# EAGLE board ProtoSnap-LilyTwinkle-Panel-v10 (EAGLE 6.3)
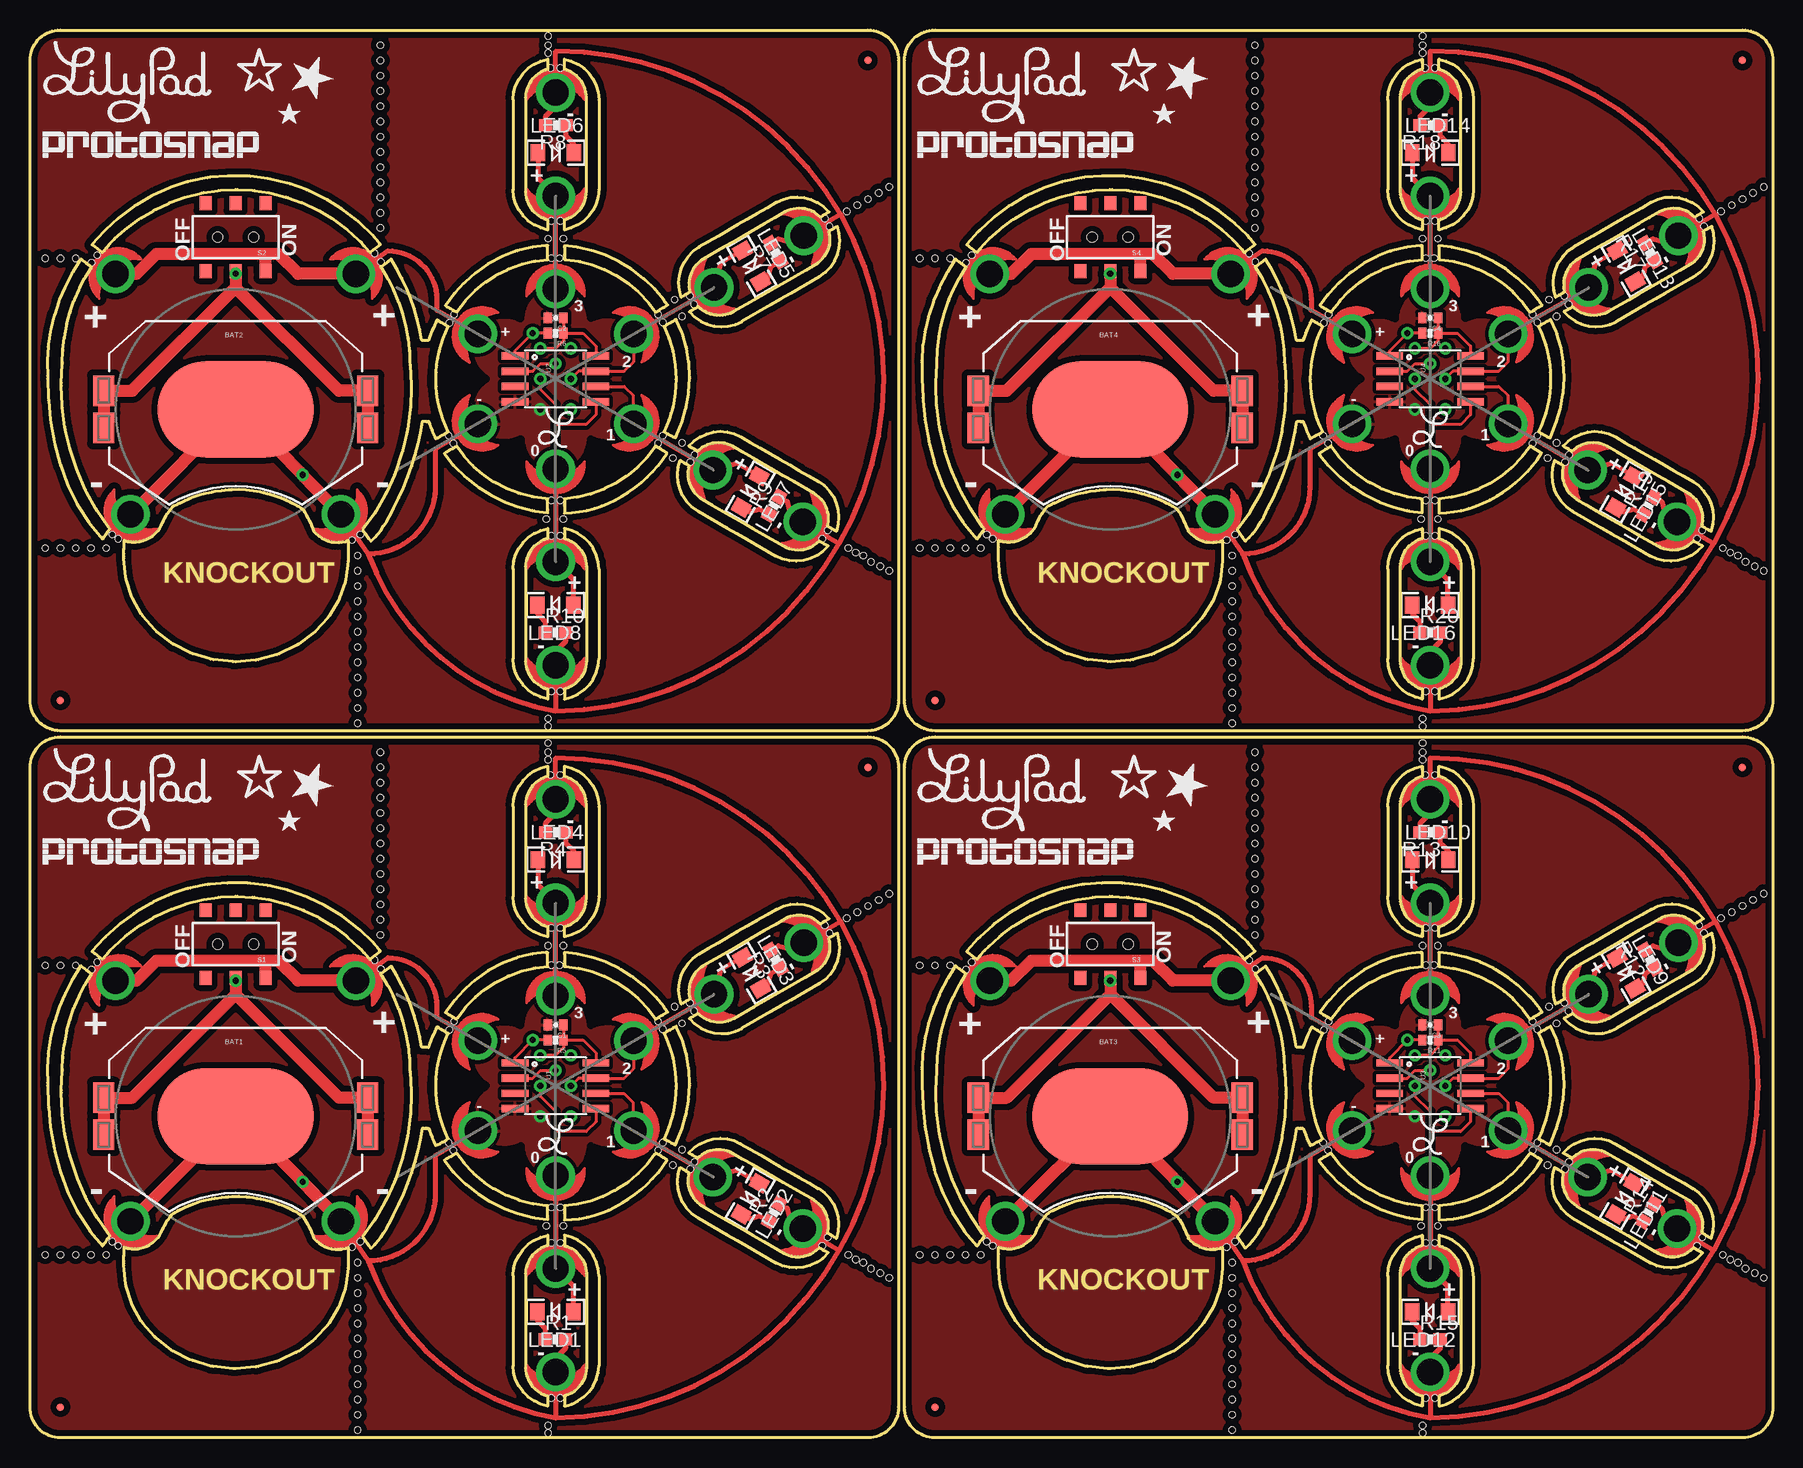
[diagram p0: board, top side]
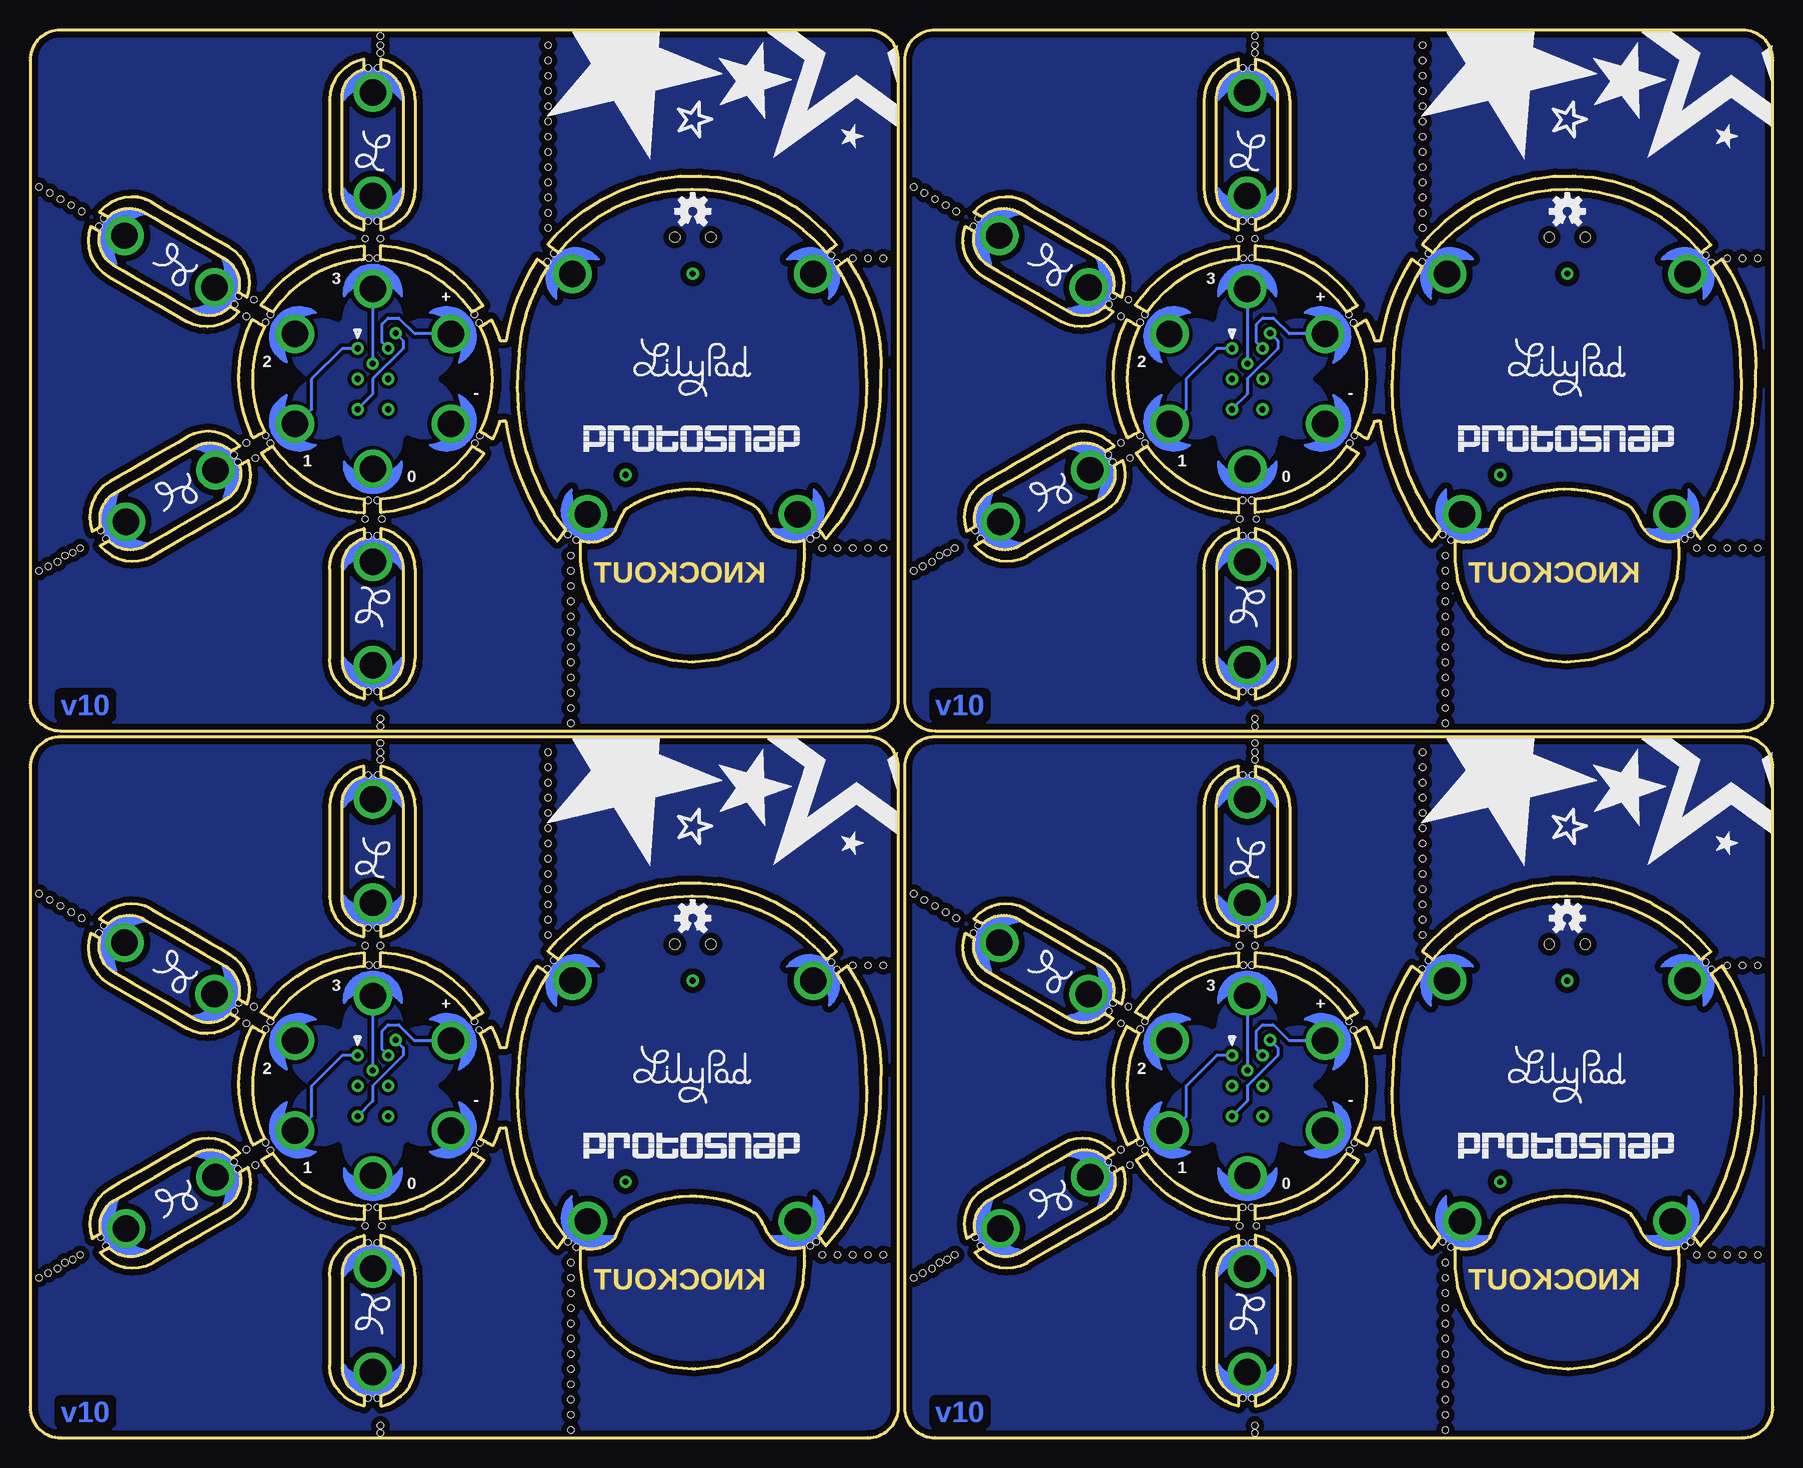
[diagram p1: board, bottom side, seen from below]

Size 145.29 x 117.35 mm. Coordinates in mm from the lower left corner, seen from the top.
Outline: 4528 segments
Copper layers (1*16): Top 0.035mm / dielectric 1.5mm / Bottom 0.035mm
Design rules "default": minimum track width 8mil, minimum drill 20mil, track to track 8mil, track to pad 8mil, pad to pad 8mil, via to via 8mil, smd to smd 8mil, copper to edge 8mil, drill to drill 8mil, minimum pad ring 12mil, minimum via ring 10mil, stop-mask expansion 4mil, vias tented up to drill 20mil, thermal gap 10mil
Holes 0.51 mm at 6.85,16.35 7.35,16 5.6,39.65 5.12,39.02 28.73,39.8 29.25,39.08 26.85,15.9 27.55,16.35 43.4,55.25 44.2,55.25 43.45,42.5 44.2,42.5 43.45,39.4 44.15,39.4 35.35,34.7 34.95,34 34.9,24.6 35.3,23.95 43.45,19.2 44.2,19.2 52.35,23.95 52.75,24.6 55.4,23 55.05,22.4 66.5,16.7 66.05,16 43.45,16.25 44.2,16.25 43.45,3.3 44.2,3.3 52.35,34.7 52.75,34.05 55,36.25 55.35,35.55 66.25,42.7 66.65,42.05 6.35,15.24 5.08,15.24 3.81,15.24 2.54,15.24 1.27,15.24 3.81,39.37 2.54,39.37 1.27,39.37 27.3,14.61 27.3,13.34 27.3,12.06 27.3,10.79 27.3,9.53 27.3,8.26 27.3,6.99 27.3,5.71 27.3,4.45 27.3,3.17 27.3,1.91 27.3,0.64 29.21,41.91 29.21,43.18 29.21,44.45 29.21,45.72 29.21,46.99 29.21,48.26 29.21,49.53 29.21,50.8 29.21,52.07 29.21,53.34 29.21,54.61 29.21,55.88 29.21,57.15 43.18,57.91 43.18,57.15 43.18,56.52 43.18,0.38 43.18,1.02 44.45,17.65 43.05,17.65 53.59,22.73 54.36,24 54.36,34.54 53.72,35.94 43.18,41.02 44.45,41.02 68.07,43.31 68.96,43.81 69.85,44.32 70.74,44.83 71.63,45.34 68.2,15.24 68.83,14.86 69.47,14.61 70.1,14.1 70.87,13.72 71.63,13.34 6.85,75.28 7.35,74.93 5.6,98.58 5.12,97.95 28.73,98.73 29.25,98 26.85,74.83 27.55,75.28 43.4,114.18 44.2,114.18 43.45,101.43 44.2,101.43 43.45,98.33 44.15,98.33 35.35,93.63 34.95,92.93 34.9,83.53 35.3,82.88 43.45,78.13 44.2,78.13 52.35,82.88 52.75,83.53 55.4,81.93 55.05,81.33 66.5,75.63 66.05,74.93 43.45,75.18 44.2,75.18 43.45,62.23 44.2,62.23 52.35,93.63 52.75,92.98 55,95.18 55.35,94.48 66.25,101.63 66.65,100.98 6.35,74.17 5.08,74.17 3.81,74.17 2.54,74.17 1.27,74.17 3.81,98.3 2.54,98.3 1.27,98.3 27.3,73.53 27.3,72.26 27.3,70.99 27.3,69.72 27.3,68.45 27.3,67.18 27.3,65.91 27.3,64.64 27.3,63.37 27.3,62.1 27.3,60.83 27.3,59.56 29.21,100.84 29.21,102.11 29.21,103.38 29.21,104.65 29.21,105.92 29.21,107.19 29.21,108.46 29.21,109.73 29.21,111 29.21,112.27 29.21,113.54 29.21,114.81 29.21,116.08 43.18,116.84 43.18,116.08 43.18,115.44 43.18,59.31 43.18,59.94 44.45,76.58 43.05,76.58 53.59,81.66 54.36,82.93 54.36,93.47 53.72,94.87 43.18,99.95 44.45,99.95 68.07,102.23 68.96,102.74 69.85,103.25 70.74,103.76 71.63,104.27 68.2,74.17 68.83,73.79 69.47,73.53 70.1,73.03 70.87,72.64 71.63,72.26 79.75,16.35 80.25,16 78.5,39.65 78.02,39.02 101.62,39.8 102.15,39.08 99.75,15.9 100.45,16.35 116.3,55.25 117.1,55.25 116.35,42.5 117.1,42.5 116.35,39.4 117.05,39.4 108.25,34.7 107.85,34 107.8,24.6 108.2,23.95 116.35,19.2 117.1,19.2 125.25,23.95 125.65,24.6 128.3,23 127.95,22.4 139.4,16.7 138.95,16 116.35,16.25 117.1,16.25 116.35,3.3 117.1,3.3 125.25,34.7 125.65,34.05 127.9,36.25 128.25,35.55 139.15,42.7 139.55,42.05 79.25,15.24 77.98,15.24 76.71,15.24 75.44,15.24 74.17,15.24 76.71,39.37 75.44,39.37 74.17,39.37 100.2,14.61 100.2,13.34 100.2,12.06 100.2,10.79 100.2,9.53 100.2,8.26 100.2,6.99 100.2,5.71 100.2,4.45 100.2,3.17 100.2,1.91 100.2,0.64 102.11,41.91 102.11,43.18 102.11,44.45 102.11,45.72 102.11,46.99 102.11,48.26 102.11,49.53 102.11,50.8 102.11,52.07 102.11,53.34 102.11,54.61 102.11,55.88 102.11,57.15 116.08,57.91 116.08,57.15 116.08,56.52 116.08,0.38 116.08,1.02 117.35,17.65 115.95,17.65 126.49,22.73 127.25,24 127.25,34.54 126.62,35.94 116.08,41.02 117.35,41.02 140.97,43.31 141.86,43.81 142.75,44.32 143.64,44.83 144.53,45.34 141.1,15.24 141.73,14.86 142.37,14.61 143,14.1 143.76,13.72 144.53,13.34 79.75,75.28 80.25,74.93 78.5,98.58 78.02,97.95 101.62,98.73 102.15,98 99.75,74.83 100.45,75.28 116.3,114.18 117.1,114.18 116.35,101.43 117.1,101.43 116.35,98.33 117.05,98.33 108.25,93.63 107.85,92.93 107.8,83.53 108.2,82.88 116.35,78.13 117.1,78.13 125.25,82.88 125.65,83.53 128.3,81.93 127.95,81.33 139.4,75.63 138.95,74.93 116.35,75.18 117.1,75.18 116.35,62.23 117.1,62.23 125.25,93.63 125.65,92.98 127.9,95.18 128.25,94.48 139.15,101.63 139.55,100.98 79.25,74.17 77.98,74.17 76.71,74.17 75.44,74.17 74.17,74.17 76.71,98.3 75.44,98.3 74.17,98.3 100.2,73.53 100.2,72.26 100.2,70.99 100.2,69.72 100.2,68.45 100.2,67.18 100.2,65.91 100.2,64.64 100.2,63.37 100.2,62.1 100.2,60.83 100.2,59.56 102.11,100.84 102.11,102.11 102.11,103.38 102.11,104.65 102.11,105.92 102.11,107.19 102.11,108.46 102.11,109.73 102.11,111 102.11,112.27 102.11,113.54 102.11,114.81 102.11,116.08 116.08,116.84 116.08,116.08 116.08,115.44 116.08,59.31 116.08,59.94 117.35,76.58 115.95,76.58 126.49,81.66 127.25,82.93 127.25,93.47 126.62,94.87 116.08,99.95 117.35,99.95 140.97,102.23 141.86,102.74 142.75,103.25 143.64,103.76 144.53,104.27 141.1,74.17 141.73,73.79 142.37,73.53 143,73.03 143.76,72.64 144.53,72.26
tRestrict: area 33.6,29.3 to 54,39.6; area 33.6,19.1 to 54,29.4; area 33.6,88.3 to 54,98.5; area 33.6,78.1 to 54,88.3; area 106.5,29.3 to 126.9,39.6; area 106.5,19.1 to 126.9,29.4; area 106.5,88.3 to 126.9,98.5; area 106.5,78.1 to 126.9,88.3
bRestrict: area 33.6,29.3 to 54,39.6; area 33.6,19.1 to 54,29.4; area 33.6,88.3 to 54,98.5; area 33.6,78.1 to 54,88.3; area 106.5,29.3 to 126.9,39.6; area 106.5,19.1 to 126.9,29.4; area 106.5,88.3 to 126.9,98.5; area 106.5,78.1 to 126.9,88.3

## Footprints (pad centres in the part's own frame; a part is rotated, then mirrored left to right if it is on the bottom)
PETAL-SMALL-2SIDE = drill 2.2: 1 0,0
PETAL-SMALL = drill 2.2: 1 0,0
BATTCON_20MM_4LEGS = smd 1.778 x 2.54: 1 -11,1.55; 3 11,1.55; P$1 -11,-1.55; P$2 11,-1.55 | smd 13 x 8: 2 0,0
0402-CAP = smd 0.7 x 0.9: 1 -0.65,0; 2 0.65,0
MICRO-FIDUCIAL = smd 0.635 x 0.635: 1 0,0
LED-1206 = smd 1.2 x 1.4: A -1.5,0; C 1.5,0
0603-RES = smd 1.1 x 1: 1 -0.85,0; 2 0.85,0
0402-RES = smd 0.7 x 0.9: 1 -0.65,0; 2 0.65,0
AYZ0202 = smd 1 x 1.15: 1 -2.5,2.825; 2 0,2.825; 3 2.5,2.825; 4 -2.5,-2.825; 5 0,-2.825; 6 2.5,-2.825 | hole 0.85: 1.5,0; -1.5,0
SO08-EIAJ = smd 0.61 x 2.21: 1 -1.905,-3.378; 2 -0.635,-3.378; 3 0.635,-3.378; 4 1.905,-3.378; 5 1.905,3.353; 6 0.635,3.353; 7 -0.635,3.353; 8 -1.905,3.353

## Placement (x,y rotation side)
1_U$1  SEWTAP6  [PETAL-SMALL-2SIDE]  37.32,84.51 300 top
1_U$2  SEWTAP6  [PETAL-SMALL-2SIDE]  37.32,25.59 300 top
1_U$3  SEWTAP6  [PETAL-SMALL-2SIDE]  50.31,25.59 60 top
1_U$4  SEWTAP6  [PETAL-SMALL-2SIDE]  50.31,33.09 120 top
1_U$5  SEWTAP6  [PETAL-SMALL-2SIDE]  37.32,33.09 240 top
1_U$6  SEWTAP6  [PETAL-SMALL-2SIDE]  43.81,36.83 180 top
1_U$7  SEWTAP6  [PETAL-SMALL-2SIDE]  43.81,21.84 0 top
1_U$8  SEWTAP6  [PETAL-SMALL-2SIDE]  50.31,84.52 60 top
1_U$9  SEWTAP6  [PETAL-SMALL-2SIDE]  50.31,92.02 120 top
1_U$10  SEWTAP6  [PETAL-SMALL-2SIDE]  37.32,92.02 240 top
1_U$11  SEWTAP6  [PETAL-SMALL-2SIDE]  43.81,95.76 180 top
1_U$12  SEWTAP6  [PETAL-SMALL-2SIDE]  43.81,80.76 0 top
1_U$13  SEWTAP6  [PETAL-SMALL-2SIDE]  110.22,25.59 300 top
1_U$14  SEWTAP6  [PETAL-SMALL-2SIDE]  123.21,25.59 60 top
1_U$15  SEWTAP6  [PETAL-SMALL-2SIDE]  123.21,33.09 120 top
1_U$16  SEWTAP6  [PETAL-SMALL-2SIDE]  110.22,33.09 240 top
1_U$17  SEWTAP6  [PETAL-SMALL-2SIDE]  116.71,36.83 180 top
1_U$18  SEWTAP6  [PETAL-SMALL-2SIDE]  116.71,21.84 0 top
1_U$19  SEWTAP6  [PETAL-SMALL-2SIDE]  110.22,84.51 300 top
1_U$20  SEWTAP6  [PETAL-SMALL-2SIDE]  123.21,84.52 60 top
1_U$21  SEWTAP6  [PETAL-SMALL-2SIDE]  123.21,92.02 120 top
1_U$22  SEWTAP6  [PETAL-SMALL-2SIDE]  110.22,92.02 240 top
1_U$23  SEWTAP6  [PETAL-SMALL-2SIDE]  116.71,95.76 180 top
1_U$24  SEWTAP6  [PETAL-SMALL-2SIDE]  116.71,80.76 0 top
3_LED+  SEWTAP6  [PETAL-SMALL]  57.02,36.96 300 top
3_LED+1  SEWTAP6  [PETAL-SMALL]  57.02,95.89 300 top
3_LED+2  SEWTAP6  [PETAL-SMALL]  129.92,36.96 300 top
3_LED+3  SEWTAP6  [PETAL-SMALL]  129.92,95.89 300 top
3_LED-  SEWTAP6  [PETAL-SMALL]  64.5,41.27 120 top
3_LED-1  SEWTAP6  [PETAL-SMALL]  64.5,100.2 120 top
3_LED-2  SEWTAP6  [PETAL-SMALL]  137.4,41.27 120 top
3_LED-3  SEWTAP6  [PETAL-SMALL]  137.4,100.2 120 top
4_LED+  SEWTAP6  [PETAL-SMALL]  43.81,44.58 0 top
4_LED+1  SEWTAP6  [PETAL-SMALL]  43.81,103.5 0 top
4_LED+2  SEWTAP6  [PETAL-SMALL]  116.71,44.58 0 top
4_LED+3  SEWTAP6  [PETAL-SMALL]  116.71,103.5 0 top
4_LED-  SEWTAP6  [PETAL-SMALL]  43.81,53.21 180 top
4_LED-1  SEWTAP6  [PETAL-SMALL]  43.81,112.14 180 top
4_LED-2  SEWTAP6  [PETAL-SMALL]  116.71,53.21 180 top
4_LED-3  SEWTAP6  [PETAL-SMALL]  116.71,112.14 180 top
5_LED+  SEWTAP6  [PETAL-SMALL]  56.93,21.73 240 top
5_LED+1  SEWTAP6  [PETAL-SMALL]  56.93,80.66 240 top
5_LED+2  SEWTAP6  [PETAL-SMALL]  129.82,21.73 240 top
5_LED+3  SEWTAP6  [PETAL-SMALL]  129.82,80.66 240 top
5_LED-  SEWTAP6  [PETAL-SMALL]  64.4,17.42 60 top
5_LED-1  SEWTAP6  [PETAL-SMALL]  64.4,76.34 60 top
5_LED-2  SEWTAP6  [PETAL-SMALL]  137.3,17.42 60 top
5_LED-3  SEWTAP6  [PETAL-SMALL]  137.3,76.34 60 top
6_LED+  SEWTAP6  [PETAL-SMALL]  43.81,14.1 180 top
6_LED+1  SEWTAP6  [PETAL-SMALL]  43.81,73.03 180 top
6_LED+2  SEWTAP6  [PETAL-SMALL]  116.71,14.1 180 top
6_LED+3  SEWTAP6  [PETAL-SMALL]  116.71,73.03 180 top
6_LED-  SEWTAP6  [PETAL-SMALL]  43.81,5.46 0 top
6_LED-1  SEWTAP6  [PETAL-SMALL]  43.81,64.39 0 top
6_LED-2  SEWTAP6  [PETAL-SMALL]  116.71,5.46 0 top
6_LED-3  SEWTAP6  [PETAL-SMALL]  116.71,64.39 0 top
B1+  SEWTAP6  [PETAL-SMALL-2SIDE]  7.11,38.1 223 top
B1+1  SEWTAP6  [PETAL-SMALL-2SIDE]  7.11,97.03 223 top
B1+2  SEWTAP6  [PETAL-SMALL-2SIDE]  80.01,38.1 223 top
B1+3  SEWTAP6  [PETAL-SMALL-2SIDE]  80.01,97.03 223 top
B1-  SEWTAP6  [PETAL-SMALL-2SIDE]  8.38,18.03 317 top
B1-1  SEWTAP6  [PETAL-SMALL-2SIDE]  8.38,76.96 317 top
B1-2  SEWTAP6  [PETAL-SMALL-2SIDE]  81.28,18.03 317 top
B1-3  SEWTAP6  [PETAL-SMALL-2SIDE]  81.28,76.96 317 top
B2+  SEWTAP6  [PETAL-SMALL-2SIDE]  27.18,38.1 137 top
B2+1  SEWTAP6  [PETAL-SMALL-2SIDE]  27.18,97.03 137 top
B2+2  SEWTAP6  [PETAL-SMALL-2SIDE]  100.08,38.1 137 top
B2+3  SEWTAP6  [PETAL-SMALL-2SIDE]  100.08,97.03 137 top
B2-  SEWTAP6  [PETAL-SMALL-2SIDE]  25.91,18.03 43 top
B2-1  SEWTAP6  [PETAL-SMALL-2SIDE]  25.91,76.96 43 top
B2-2  SEWTAP6  [PETAL-SMALL-2SIDE]  98.81,18.03 43 top
B2-3  SEWTAP6  [PETAL-SMALL-2SIDE]  98.81,76.96 43 top
BAT1  [BATTCON_20MM_4LEGS]  17.14,26.8 0 top
BAT2  [BATTCON_20MM_4LEGS]  17.14,85.72 0 top
BAT3  [BATTCON_20MM_4LEGS]  90.04,26.8 0 top
BAT4  [BATTCON_20MM_4LEGS]  90.04,85.72 0 top
BATT_LOGO  LOGO-LPLP  [LOGO-LILYPAD]  17.14,30.61 0 bottom
BATT_LOGO1  LOGO-LPLP  [LOGO-LILYPAD]  17.14,89.53 0 bottom
BATT_LOGO2  LOGO-LPLP  [LOGO-LILYPAD]  90.04,30.61 0 bottom
BATT_LOGO3  LOGO-LPLP  [LOGO-LILYPAD]  90.04,89.53 0 bottom
BATT_OHS  OSHW-LOGOS  [OSHW-LOGO-S]  17.14,43.31 0 bottom
BATT_OHS1  OSHW-LOGOS  [OSHW-LOGO-S]  17.14,102.23 0 bottom
BATT_OHS2  OSHW-LOGOS  [OSHW-LOGO-S]  90.04,43.31 0 bottom
BATT_OHS3  OSHW-LOGOS  [OSHW-LOGO-S]  90.04,102.23 0 bottom
C1  0.1uF  [0402-CAP]  43.81,34.42 180 top
C2  0.1uF  [0402-CAP]  43.81,93.34 180 top
C3  0.1uF  [0402-CAP]  116.71,34.42 180 top
C4  0.1uF  [0402-CAP]  116.71,93.34 180 top
JP1  FIDUCIALUFIDUCIAL  [MICRO-FIDUCIAL]  2.54,2.54 0 top
JP2  FIDUCIALUFIDUCIAL  [MICRO-FIDUCIAL]  69.85,55.88 0 top
JP3  FIDUCIALUFIDUCIAL  [MICRO-FIDUCIAL]  2.54,61.47 0 top
JP4  FIDUCIALUFIDUCIAL  [MICRO-FIDUCIAL]  69.85,114.81 0 top
JP5  FIDUCIALUFIDUCIAL  [MICRO-FIDUCIAL]  75.44,2.54 0 top
JP6  FIDUCIALUFIDUCIAL  [MICRO-FIDUCIAL]  142.75,55.88 0 top
JP7  FIDUCIALUFIDUCIAL  [MICRO-FIDUCIAL]  75.44,61.47 0 top
JP8  FIDUCIALUFIDUCIAL  [MICRO-FIDUCIAL]  142.75,114.81 0 top
LED1  White  [LED-1206]  43.8,10.49 180 top
LED1_LOGO  LOGO-LPL  [LOGO-L]  43.81,10.34 180 bottom
LED1_LOGO1  LOGO-LPL  [LOGO-L]  43.81,69.27 180 bottom
LED1_LOGO2  LOGO-LPL  [LOGO-L]  116.71,10.34 180 bottom
LED1_LOGO3  LOGO-LPL  [LOGO-L]  116.71,69.27 180 bottom
LED2  White  [LED-1206]  60.04,19.91 240 top
LED2_LOGO  LOGO-LPL  [LOGO-L]  60.18,19.85 120 bottom
LED2_LOGO1  LOGO-LPL  [LOGO-L]  60.18,78.78 120 bottom
LED2_LOGO2  LOGO-LPL  [LOGO-L]  133.08,19.85 120 bottom
LED2_LOGO3  LOGO-LPL  [LOGO-L]  133.08,78.78 120 bottom
LED3  White  [LED-1206]  60.16,38.74 300 top
LED3_LOGO  LOGO-LPL  [LOGO-L]  60.28,38.84 60 bottom
LED3_LOGO1  LOGO-LPL  [LOGO-L]  60.28,97.76 60 bottom
LED3_LOGO2  LOGO-LPL  [LOGO-L]  133.18,38.84 60 bottom
LED3_LOGO3  LOGO-LPL  [LOGO-L]  133.18,97.76 60 bottom
LED4  White  [LED-1206]  43.84,48.18 0 top
LED4_LOGO  LOGO-LPL  [LOGO-L]  43.81,48.34 0 bottom
LED4_LOGO1  LOGO-LPL  [LOGO-L]  43.81,107.26 0 bottom
LED4_LOGO2  LOGO-LPL  [LOGO-L]  116.71,48.34 0 bottom
LED4_LOGO3  LOGO-LPL  [LOGO-L]  116.71,107.26 0 bottom
LED5  White  [LED-1206]  60.16,97.67 300 top
LED6  White  [LED-1206]  43.84,107.11 0 top
LED7  White  [LED-1206]  60.04,78.84 240 top
LED8  White  [LED-1206]  43.8,69.42 180 top
LED9  White  [LED-1206]  133.05,38.74 300 top
LED10  White  [LED-1206]  116.73,48.18 0 top
LED11  White  [LED-1206]  132.94,19.91 240 top
LED12  White  [LED-1206]  116.69,10.49 180 top
LED13  White  [LED-1206]  133.05,97.67 300 top
LED14  White  [LED-1206]  116.73,107.11 0 top
LED15  White  [LED-1206]  132.94,78.84 240 top
LED16  White  [LED-1206]  116.69,69.42 180 top
R1  100  [0603-RES]  43.8,8.21 0 top
R2  100  [0603-RES]  62.02,18.77 60 top
R3  100  [0603-RES]  62.14,39.89 120 top
R4  100  [0603-RES]  43.84,50.47 180 top
R5  10k  [0402-RES]  43.81,33.15 180 top
R6  10k  [0402-RES]  43.81,92.08 180 top
R7  100  [0603-RES]  62.14,98.81 120 top
R8  100  [0603-RES]  43.84,109.4 180 top
R9  100  [0603-RES]  62.02,77.7 60 top
R10  100  [0603-RES]  43.8,67.13 0 top
R11  10k  [0402-RES]  116.71,33.15 180 top
R12  100  [0603-RES]  135.03,39.89 120 top
R13  100  [0603-RES]  116.73,50.47 180 top
R14  100  [0603-RES]  134.92,18.77 60 top
R15  100  [0603-RES]  116.69,8.21 0 top
R16  10k  [0402-RES]  116.71,92.08 180 top
R17  100  [0603-RES]  135.03,98.81 120 top
R18  100  [0603-RES]  116.73,109.4 180 top
R19  100  [0603-RES]  134.92,77.7 60 top
R20  100  [0603-RES]  116.69,67.13 0 top
S1  [AYZ0202]  17.14,41.15 180 top
S2  [AYZ0202]  17.14,100.08 180 top
S3  [AYZ0202]  90.04,41.15 180 top
S4  [AYZ0202]  90.04,100.08 180 top
TINY_LOGO  LOGO-LPL  [LOGO-L]  43.81,25.27 0 top
TINY_LOGO1  LOGO-LPL  [LOGO-L]  43.81,84.2 0 top
TINY_LOGO2  LOGO-LPL  [LOGO-L]  116.71,25.27 0 top
TINY_LOGO3  LOGO-LPL  [LOGO-L]  116.71,84.2 0 top
U1  ATTINY85  [SO08-EIAJ]  43.81,29.34 270 top
U2  ATTINY85  [SO08-EIAJ]  43.81,88.27 270 top
U3  ATTINY85  [SO08-EIAJ]  116.71,29.34 270 top
U4  ATTINY85  [SO08-EIAJ]  116.71,88.27 270 top

## Library data of the parts
1_U$1-1_U$24 = 1_LilyPad-Wearables
3_LED+ 3_LED+1-3_LED+3 3_LED- 3_LED-1-3_LED-3 = 3_LilyPad-Wearables
4_LED+ 4_LED+1-4_LED+3 4_LED- 4_LED-1-4_LED-3 = 4_LilyPad-Wearables
5_LED+ 5_LED+1-5_LED+3 5_LED- 5_LED-1-5_LED-3 = 5_LilyPad-Wearables
6_LED+ 6_LED+1-6_LED+3 6_LED- 6_LED-1-6_LED-3 = 6_LilyPad-Wearables
B1+ B1+1-B1+3 B1- B1-1-B1-3 B2+ B2+1-B2+3 B2- B2-1-B2-3 = 2_LilyPad-Wearables
BAT1-BAT4 = SparkFun-Electromechanical; PROD_ID: BATT-10373; VALUE: 20mm coincell
BATT_LOGO BATT_LOGO1-BATT_LOGO3 LED1_LOGO LED1_LOGO1-LED1_LOGO3 LED2_LOGO LED2_LOGO1-LED2_LOGO3 LED3_LOGO LED3_LOGO1-LED3_LOGO3 LED4_LOGO LED4_LOGO1-LED4_LOGO3 TINY_LOGO TINY_LOGO1-TINY_LOGO3 = LilyPad-Wearables
BATT_OHS BATT_OHS1-BATT_OHS3 = 2_SparkFun-Aesthetics
C1-C4 = SparkFun-Capacitors; PROD_ID: CAP-00810
JP1-JP8 = SparkFun
LED1-LED16 = SparkFun-LED; PROD_ID: DIO-09955; VALUE: WHITE
R1 R10 R15 R20 = 6_SparkFun; PROD_ID: RES-07863
R2 R9 R14 R19 = 5_SparkFun; PROD_ID: RES-07863
R3 R7 R12 R17 = 3_SparkFun; PROD_ID: RES-07863
R4 R8 R13 R18 = 4_SparkFun; PROD_ID: RES-07863
R5 R6 R11 R16 = SparkFun-Resistors; PROD_ID: RES-00824
S1-S4 = SparkFun-Electromechanical; PROD_ID: SWCH-08179
U1-U4 = SparkFun-DigitalIC; PROD_ID: IC-09092; VALUE: Tiny85-20-SMT

## Nets
2_N$1: BAT2.1 S2.2
2_N$2: BAT3.1 S3.2
2_N$3: BAT1.1 S1.2
2_N$4: BAT4.1 S4.2
3_N$1: LED3.C R3.1
3_N$2: LED5.C R7.1
3_N$3: LED9.C R12.1
3_N$4: LED13.C R17.1
4_N$1: LED4.C R4.1
4_N$2: LED6.C R8.1
4_N$3: LED10.C R13.1
4_N$4: LED14.C R18.1
5_N$1: LED2.C R2.1
5_N$2: LED7.C R9.1
5_N$3: LED11.C R14.1
5_N$4: LED15.C R19.1
6_N$1: LED1.C R1.1
6_N$2: LED8.C R10.1
6_N$3: LED12.C R15.1
6_N$4: LED16.C R20.1
GND: 1_U$2.1 3_LED-.1 4_LED-.1 5_LED-.1 6_LED-.1 B1-.1 B2-.1 BAT1.2 C1.2 R1.2 R2.2 R3.2 R4.2 U1.4
GND1: 1_U$1.1 3_LED-1.1 4_LED-1.1 5_LED-1.1 6_LED-1.1 B1-1.1 B2-1.1 BAT2.2 C2.2 R7.2 R8.2 R9.2 R10.2 U2.4
GND2: 1_U$13.1 3_LED-2.1 4_LED-2.1 5_LED-2.1 6_LED-2.1 B1-2.1 B2-2.1 BAT3.2 C3.2 R12.2 R13.2 R14.2 R15.2 U3.4
GND3: 1_U$19.1 3_LED-3.1 4_LED-3.1 5_LED-3.1 6_LED-3.1 B1-3.1 B2-3.1 BAT4.2 C4.2 R17.2 R18.2 R19.2 R20.2 U4.4
LED1+: 1_U$7.1 6_LED+.1 LED1.A U1.5
LED1+1: 1_U$12.1 6_LED+1.1 LED8.A U2.5
LED1+2: 1_U$18.1 6_LED+2.1 LED12.A U3.5
LED1+3: 1_U$24.1 6_LED+3.1 LED16.A U4.5
LED2+: 1_U$3.1 5_LED+.1 LED2.A U1.6
LED2+1: 1_U$8.1 5_LED+1.1 LED7.A U2.6
LED2+2: 1_U$14.1 5_LED+2.1 LED11.A U3.6
LED2+3: 1_U$20.1 5_LED+3.1 LED15.A U4.6
LED3+: 1_U$4.1 3_LED+.1 LED3.A U1.7
LED3+1: 1_U$9.1 3_LED+1.1 LED5.A U2.7
LED3+2: 1_U$15.1 3_LED+2.1 LED9.A U3.7
LED3+3: 1_U$21.1 3_LED+3.1 LED13.A U4.7
LED4+: 1_U$6.1 4_LED+.1 LED4.A U1.2
LED4+1: 1_U$11.1 4_LED+1.1 LED6.A U2.2
LED4+2: 1_U$17.1 4_LED+2.1 LED10.A U3.2
LED4+3: 1_U$23.1 4_LED+3.1 LED14.A U4.2
RESET: R5.2 U1.1
RESET1: R6.2 U2.1
RESET2: R11.2 U3.1
RESET3: R16.2 U4.1
V+: 1_U$5.1 B1+.1 B2+.1 C1.1 R5.1 S1.1 U1.8
V+1: 1_U$10.1 B1+1.1 B2+1.1 C2.1 R6.1 S2.1 U2.8
V+2: 1_U$16.1 B1+2.1 B2+2.1 C3.1 R11.1 S3.1 U3.8
V+3: 1_U$22.1 B1+3.1 B2+3.1 C4.1 R16.1 S4.1 U4.8

## Tracks (layer width: path | path; a pad name or v marks a point on that pad's centre or on a via)
1_N$2  (via drill 0.51)
  other vias: 42.55,88.27
1_N$3  (via drill 0.51)
  other vias: 45.09,88.27
1_N$4  (via drill 0.51)
  Bottom 0.254: v45.09,90.81 46.35,90.81 48.9,88.27
1_N$5  (via drill 0.51)
  other vias: 115.44,29.34
1_N$6  (via drill 0.51)
  other vias: 117.98,29.34
1_N$7  (via drill 0.51)
  other vias: 42.55,29.34
1_N$8  (via drill 0.51)
  other vias: 45.09,29.34
1_N$9  (via drill 0.51)
  Bottom 0.254: v45.09,31.88 46.35,31.88 48.9,29.34
1_N$10  (via drill 0.51)
  Bottom 0.254: v117.98,31.88 119.25,31.88 121.79,29.34
1_N$11  (via drill 0.51)
  other vias: 115.44,88.27
1_N$12  (via drill 0.51)
  other vias: 117.98,88.27
1_N$13  (via drill 0.51)
  Bottom 0.254: v117.98,90.81 119.25,90.81 121.79,88.27
2_N$1  (via drill 0.51)
  Top 1.016: S2.2 v17.14,97.03 17.14,95.89 | 17.14,95.89 8.54,87.28 BAT2.1 6.14,84.17 | 28.14,84.17 28.14,87.28 25.75,87.28 17.14,95.89
2_N$2  (via drill 0.51)
  Top 1.016: S3.2 v90.04,38.1 90.04,36.96 | 90.04,36.96 81.43,28.35 BAT3.1 79.04,25.25 | 101.04,25.25 101.04,28.35 98.65,28.35 90.04,36.96
2_N$3  (via drill 0.51)
  Top 1.016: S1.2 v17.14,38.1 17.14,36.96 | 17.14,36.96 8.54,28.35 BAT1.1 6.14,25.25 | 28.14,25.25 28.14,28.35 25.75,28.35 17.14,36.96
2_N$4  (via drill 0.51)
  Top 1.016: S4.2 v90.04,97.03 90.04,95.89 | 90.04,95.89 81.43,87.28 BAT4.1 79.04,84.17 | 101.04,84.17 101.04,87.28 98.65,87.28 90.04,95.89
3_N$1
  Top 0.254: 61.69,38.4 61.71,38.49
  Top 0.406: LED3.C 61.53,37.8 61.69,38.4 61.76,38.69 R3.1
3_N$2
  Top 0.254: 61.69,97.33 61.71,97.42
  Top 0.406: LED5.C 61.53,96.73 61.69,97.33 61.76,97.62 R7.1
3_N$3
  Top 0.254: 134.59,38.4 134.61,38.49
  Top 0.406: LED9.C 134.42,37.8 134.59,38.4 134.66,38.69 R12.1
3_N$4
  Top 0.254: 134.59,97.33 134.61,97.42
  Top 0.406: LED13.C 134.42,96.73 134.59,97.33 134.66,97.62 R17.1
4_N$1
  Top 0.254: 44.9,49.34 44.83,49.4
  Top 0.406: LED4.C 45.34,48.9 44.9,49.34 44.69,49.55 R4.1
4_N$2
  Top 0.254: 44.9,108.27 44.83,108.33
  Top 0.406: LED6.C 45.34,107.83 44.9,108.27 44.69,108.48 R8.1
4_N$3
  Top 0.254: 117.79,49.34 117.73,49.4
  Top 0.406: LED10.C 118.23,48.9 117.79,49.34 117.58,49.55 R13.1
4_N$4
  Top 0.254: 117.79,108.27 117.73,108.33
  Top 0.406: LED14.C 118.23,107.83 117.79,108.27 117.58,108.48 R18.1
5_N$1
  Top 0.254: 60.51,18.42 60.6,18.44
  Top 0.406: LED2.C 59.91,18.26 60.51,18.42 60.8,18.5 R2.1
5_N$2
  Top 0.254: 60.51,77.35 60.6,77.37
  Top 0.406: LED7.C 59.91,77.19 60.51,77.35 60.8,77.42 R9.1
5_N$3
  Top 0.254: 133.41,18.42 133.5,18.44
  Top 0.406: LED11.C 132.81,18.26 133.41,18.42 133.69,18.5 R14.1
5_N$4
  Top 0.254: 133.41,77.35 133.5,77.37
  Top 0.406: LED15.C 132.81,77.19 133.41,77.35 133.69,77.42 R19.1
6_N$1
  Top 0.254: 42.74,9.34 42.8,9.27
  Top 0.406: LED1.C 42.3,9.78 42.74,9.34 42.95,9.12 R1.1
6_N$2
  Top 0.254: 42.74,68.26 42.8,68.2
  Top 0.406: LED8.C 42.3,68.7 42.74,68.26 42.95,68.05 R10.1
6_N$3
  Top 0.254: 115.63,9.34 115.7,9.27
  Top 0.406: LED12.C 115.19,9.78 115.63,9.34 115.84,9.12 R15.1
6_N$4
  Top 0.254: 115.63,68.26 115.7,68.2
  Top 0.406: LED16.C 115.19,68.7 115.63,68.26 115.84,68.05 R20.1
GND  (via drill 0.51)
  Top 0.406: R2.2 63.11,19.12 63.41,17.99 5_LED-.1 67.44,15.62 | R4.2 42.98,51.24 43.81,52.07 4_LED-.1 43.81,56.64 arc-60 67.56,43.05 | R3.2 62.38,41.01 63.51,40.7 3_LED-.1 67.56,43.05 | R1.2 44.65,7.43 43.81,6.6 6_LED-.1 43.81,1.65 | B2-.1 28.19,14.73 | 1_U$2.1 33.78,23.5 33.78,20.32 arc-90 28.19,14.73 | 28.19,14.73 arc60 43.81,1.65 | 43.81,1.65 arc60 67.44,15.62 | 67.44,15.62 arc60 67.56,43.05
  Top 1.016: 7.49,17.14 B1-.1 BAT1.2 17.4,26.8 B2-.1 v22.73,21.34
  other vias: 42.55,26.8
  pour Top (isolate 0.305): 43.18,38.1 36.83,34.29 35.56,33.02 35.56,25.4 41.91,20.32 46.99,20.32 52.07,25.4 52.07,34.29 44.45,38.1
GND1  (via drill 0.51)
  Top 0.406: R9.2 63.11,78.05 63.41,76.92 5_LED-1.1 67.44,74.55 | R8.2 42.98,110.17 43.81,111 4_LED-1.1 43.81,115.57 arc-60 67.56,101.98 | R7.2 62.38,99.94 63.51,99.63 3_LED-1.1 67.56,101.98 | R10.2 44.65,66.36 43.81,65.53 6_LED-1.1 43.81,60.58 | B2-1.1 28.19,73.66 | 1_U$1.1 33.78,82.42 33.78,79.25 arc-90 28.19,73.66 | 28.19,73.66 arc60 43.81,60.58 | 43.81,60.58 arc60 67.44,74.55 | 67.44,74.55 arc60 67.56,101.98
  Top 1.016: 7.49,76.07 B1-1.1 BAT2.2 17.4,85.72 B2-1.1 v22.73,80.26
  other vias: 42.55,85.72
  pour Top (isolate 0.305): 43.18,97.03 36.83,93.22 35.56,91.95 35.56,84.33 41.91,79.25 46.99,79.25 52.07,84.33 52.07,93.22 44.45,97.03
GND2  (via drill 0.51)
  Top 0.406: R14.2 136.01,19.12 136.31,17.99 5_LED-2.1 140.34,15.62 | R13.2 115.88,51.24 116.71,52.07 4_LED-2.1 116.71,56.64 arc-60 140.46,43.05 | R12.2 135.28,41.01 136.41,40.7 3_LED-2.1 140.46,43.05 | R15.2 117.54,7.43 116.71,6.6 6_LED-2.1 116.71,1.65 | B2-2.1 101.09,14.73 | 1_U$13.1 106.68,23.5 106.68,20.32 arc-90 101.09,14.73 | 101.09,14.73 arc60 116.71,1.65 | 116.71,1.65 arc60 140.34,15.62 | 140.34,15.62 arc60 140.46,43.05
  Top 1.016: 80.39,17.14 B1-2.1 BAT3.2 90.3,26.8 B2-2.1 v95.63,21.34
  other vias: 115.44,26.8
  pour Top (isolate 0.305): 116.08,38.1 109.73,34.29 108.46,33.02 108.46,25.4 114.81,20.32 119.89,20.32 124.97,25.4 124.97,34.29 117.35,38.1
GND3  (via drill 0.51)
  Top 0.406: R19.2 136.01,78.05 136.31,76.92 5_LED-3.1 140.34,74.55 | R18.2 115.88,110.17 116.71,111 4_LED-3.1 116.71,115.57 arc-60 140.46,101.98 | R17.2 135.28,99.94 136.41,99.63 3_LED-3.1 140.46,101.98 | R20.2 117.54,66.36 116.71,65.53 6_LED-3.1 116.71,60.58 | B2-3.1 101.09,73.66 | 1_U$19.1 106.68,82.42 106.68,79.25 arc-90 101.09,73.66 | 101.09,73.66 arc60 116.71,60.58 | 116.71,60.58 arc60 140.34,74.55 | 140.34,74.55 arc60 140.46,101.98
  Top 1.016: 80.39,76.07 B1-3.1 BAT4.2 90.3,85.72 B2-3.1 v95.63,80.26
  other vias: 115.44,85.72
  pour Top (isolate 0.305): 116.08,97.03 109.73,93.22 108.46,91.95 108.46,84.33 114.81,79.25 119.89,79.25 124.97,84.33 124.97,93.22 117.35,97.03
LED1+
  Top 0.254: 42.55,29.34 42.55,28.45 43.81,27.18 43.81,25.53 | 1_U$7.1 43.81,25.53 | U1.5 47.17,26.34 46.35,25.53 43.81,25.53
  Top 0.406: 6_LED+.1 43.81,14.22 | LED1.A 45.3,12.62 6_LED+.1 | 1_U$7.1 6_LED+.1
LED1+1
  Top 0.254: 42.55,88.27 42.55,87.38 43.81,86.11 43.81,84.45 | 1_U$12.1 43.81,84.45 | U2.5 47.17,85.27 46.35,84.45 43.81,84.45
  Top 0.406: 6_LED+1.1 43.81,73.15 | LED8.A 45.3,71.55 6_LED+1.1 | 1_U$12.1 6_LED+1.1
LED1+2
  Top 0.254: 115.44,29.34 115.44,28.45 116.71,27.18 116.71,25.53 | 1_U$18.1 116.71,25.53 | U3.5 120.07,26.34 119.25,25.53 116.71,25.53
  Top 0.406: 6_LED+2.1 116.71,14.22 | LED12.A 118.19,12.62 6_LED+2.1 | 1_U$18.1 6_LED+2.1
LED1+3
  Top 0.254: 115.44,88.27 115.44,87.38 116.71,86.11 116.71,84.45 | 1_U$24.1 116.71,84.45 | U4.5 120.07,85.27 119.25,84.45 116.71,84.45
  Top 0.406: 6_LED+3.1 116.71,73.15 | LED16.A 118.19,71.55 6_LED+3.1 | 1_U$24.1 6_LED+3.1
LED2+
  Top 0.254: U1.6 49.53,28.7 50.31,27.92 1_U$3.1
  Top 0.406: 5_LED+.1 56.81,21.8 | LED2.A 58.95,22.28 5_LED+.1 | 1_U$3.1 5_LED+.1
  Bottom 0.254: 1_U$3.1 50.1,25.59 48.9,26.8 48.9,29.34
LED2+1
  Top 0.254: U2.6 49.53,87.63 50.31,86.85 1_U$8.1
  Top 0.406: 5_LED+1.1 56.81,80.73 | LED7.A 58.95,81.2 5_LED+1.1 | 1_U$8.1 5_LED+1.1
  Bottom 0.254: 1_U$8.1 50.1,84.52 48.9,85.72 48.9,88.27
LED2+2
  Top 0.254: U3.6 122.43,28.7 123.21,27.92 1_U$14.1
  Top 0.406: 5_LED+2.1 129.71,21.8 | LED11.A 131.84,22.28 5_LED+2.1 | 1_U$14.1 5_LED+2.1
  Bottom 0.254: 1_U$14.1 123,25.59 121.79,26.8 121.79,29.34
LED2+3
  Top 0.254: U4.6 122.43,87.63 123.21,86.85 1_U$20.1
  Top 0.406: 5_LED+3.1 129.71,80.73 | LED15.A 131.84,81.2 5_LED+3.1 | 1_U$20.1 5_LED+3.1
  Bottom 0.254: 1_U$20.1 123,84.52 121.79,85.72 121.79,88.27
LED3+
  Top 0.254: 45.09,29.34 45.72,29.97 U1.7 49.53,29.97 50.31,30.75 1_U$4.1
  Top 0.406: 3_LED+.1 56.91,36.89 | LED3.A 57.56,38.98 3_LED+.1 | 1_U$4.1 3_LED+.1
LED3+1
  Top 0.254: 45.09,88.27 45.72,88.9 U2.7 49.53,88.9 50.31,89.68 1_U$9.1
  Top 0.406: 3_LED+1.1 56.91,95.82 | LED5.A 57.56,97.91 3_LED+1.1 | 1_U$9.1 3_LED+1.1
LED3+2
  Top 0.254: 117.98,29.34 118.62,29.97 U3.7 122.43,29.97 123.21,30.75 1_U$15.1
  Top 0.406: 3_LED+2.1 129.81,36.89 | LED9.A 130.46,38.98 3_LED+2.1 | 1_U$15.1 3_LED+2.1
LED3+3
  Top 0.254: 117.98,88.27 118.62,88.9 U4.7 122.43,88.9 123.21,89.68 1_U$21.1
  Top 0.406: 3_LED+3.1 129.81,95.82 | LED13.A 130.46,97.91 3_LED+3.1 | 1_U$21.1 3_LED+3.1
LED4+  (via drill 0.51)
  Top 0.254: U1.2 41.91,29.97 42.55,30.61 v43.81,30.61
  Top 0.406: 4_LED+.1 43.81,44.45 | LED4.A 42.34,46.06 4_LED+.1 | 1_U$6.1 4_LED+.1
  Bottom 0.254: 1_U$6.1 v43.81,30.61
LED4+1  (via drill 0.51)
  Top 0.254: U2.2 41.91,88.9 42.55,89.53 v43.81,89.53
  Top 0.406: 4_LED+1.1 43.81,103.38 | LED6.A 42.34,104.98 4_LED+1.1 | 1_U$11.1 4_LED+1.1
  Bottom 0.254: 1_U$11.1 v43.81,89.53
LED4+2  (via drill 0.51)
  Top 0.254: U3.2 114.81,29.97 115.44,30.61 v116.71,30.61
  Top 0.406: 4_LED+2.1 116.71,44.45 | LED10.A 115.23,46.06 4_LED+2.1 | 1_U$17.1 4_LED+2.1
  Bottom 0.254: 1_U$17.1 v116.71,30.61
LED4+3  (via drill 0.51)
  Top 0.254: U4.2 114.81,88.9 115.44,89.53 v116.71,89.53
  Top 0.406: 4_LED+3.1 116.71,103.38 | LED14.A 115.23,104.98 4_LED+3.1 | 1_U$23.1 4_LED+3.1
  Bottom 0.254: 1_U$23.1 v116.71,89.53
N$1
  pour Bottom (isolate 0.305): 44.45,38.1 43.18,38.1 36.83,34.29 35.56,33.02 35.56,25.4 36.83,24.13 41.91,20.32 46.99,20.32 52.07,25.4 52.07,34.29
N$2
  pour Bottom (isolate 0.508): 69.85,0 2.54,0 arc-90 0,2.54 0,55.88 arc-90 2.54,58.42 69.85,58.42 arc-90 72.39,55.88 72.39,2.54 arc-90
N$3
  pour Top (isolate 0.508): 69.85,0 2.54,0 arc-90 0,2.54 0,55.88 arc-90 2.54,58.42 69.85,58.42 arc-90 72.39,55.88 72.39,2.54 arc-90
N$4
  pour Bottom (isolate 0.305): 44.45,97.03 43.18,97.03 36.83,93.22 35.56,91.95 35.56,84.33 36.83,83.06 41.91,79.25 46.99,79.25 52.07,84.33 52.07,93.22
N$5
  pour Bottom (isolate 0.508): 69.85,58.93 2.54,58.93 arc-90 0,61.47 0,114.81 arc-90 2.54,117.35 69.85,117.35 arc-90 72.39,114.81 72.39,61.47 arc-90
N$6
  pour Top (isolate 0.508): 69.85,58.93 2.54,58.93 arc-90 0,61.47 0,114.81 arc-90 2.54,117.35 69.85,117.35 arc-90 72.39,114.81 72.39,61.47 arc-90
N$7
  pour Bottom (isolate 0.305): 117.35,38.1 116.08,38.1 109.73,34.29 108.46,33.02 108.46,25.4 109.73,24.13 114.81,20.32 119.89,20.32 124.97,25.4 124.97,34.29
N$8
  pour Bottom (isolate 0.508): 142.75,0 75.44,0 arc-90 72.9,2.54 72.9,55.88 arc-90 75.44,58.42 142.75,58.42 arc-90 145.29,55.88 145.29,2.54 arc-90
N$9
  pour Top (isolate 0.508): 142.75,0 75.44,0 arc-90 72.9,2.54 72.9,55.88 arc-90 75.44,58.42 142.75,58.42 arc-90 145.29,55.88 145.29,2.54 arc-90
N$10
  pour Bottom (isolate 0.305): 117.35,97.03 116.08,97.03 109.73,93.22 108.46,91.95 108.46,84.33 109.73,83.06 114.81,79.25 119.89,79.25 124.97,84.33 124.97,93.22
N$11
  pour Bottom (isolate 0.508): 142.75,58.93 75.44,58.93 arc-90 72.9,61.47 72.9,114.81 arc-90 75.44,117.35 142.75,117.35 arc-90 145.29,114.81 145.29,61.47 arc-90
N$12
  pour Top (isolate 0.508): 142.75,58.93 75.44,58.93 arc-90 72.9,61.47 72.9,114.81 arc-90 75.44,117.35 142.75,117.35 arc-90 145.29,114.81 145.29,61.47 arc-90
RESET  (via drill 0.51)
  Top 0.254: R5.2 v41.91,33.15 40.44,31.67 U1.1
  Bottom 0.254: v41.91,33.15 41.27,32.51 41.27,31.88 43.81,29.34 43.81,28.07 v45.09,26.8
RESET1  (via drill 0.51)
  Top 0.254: R6.2 v41.91,92.08 40.44,90.6 U2.1
  Bottom 0.254: v41.91,92.08 41.27,91.44 41.27,90.81 43.81,88.27 43.81,87 v45.09,85.72
RESET2  (via drill 0.51)
  Top 0.254: R11.2 v114.81,33.15 113.33,31.67 U3.1
  Bottom 0.254: v114.81,33.15 114.17,32.51 114.17,31.88 116.71,29.34 116.71,28.07 v117.98,26.8
RESET3  (via drill 0.51)
  Top 0.254: R16.2 v114.81,92.08 113.33,90.6 U4.1
  Bottom 0.254: v114.81,92.08 114.17,91.44 114.17,90.81 116.71,88.27 116.71,87 v117.98,85.72
V+  (via drill 0.51)
  Top 0.254: U1.8 47.17,32.08 46.1,33.15 R5.1 | C1.1 R5.1 | R5.1 44.47,32.53 43.81,31.88 v42.55,31.88
  Top 0.406: 1_U$5.1 33.91,35.05 33.91,35.94 arc90 29.84,40.01 B2+.1
  Top 1.016: B2+.1 22.35,38.1 20.7,39.75 19.68,39.75 | 19.68,39.75 10.54,39.75 8.89,38.1 B1+.1 | S1.1 19.64,39.71 19.68,39.75
  Bottom 0.254: v42.55,31.88 43.05,32.38 43.05,33.91 42.55,34.42 41.66,34.42 40.33,33.09 1_U$5.1
V+1  (via drill 0.51)
  Top 0.254: U2.8 47.17,91.01 46.1,92.08 R6.1 | C2.1 R6.1 | R6.1 44.47,91.45 43.81,90.81 v42.55,90.81
  Top 0.406: 1_U$10.1 33.91,93.98 33.91,94.87 arc90 29.84,98.93 B2+1.1
  Top 1.016: B2+1.1 22.35,97.03 20.7,98.68 19.68,98.68 | 19.68,98.68 10.54,98.68 8.89,97.03 B1+1.1 | S2.1 19.64,98.64 19.68,98.68
  Bottom 0.254: v42.55,90.81 43.05,91.31 43.05,92.84 42.55,93.34 41.66,93.34 40.33,92.02 1_U$10.1
V+2  (via drill 0.51)
  Top 0.254: U3.8 120.07,32.08 119,33.15 R11.1 | C3.1 R11.1 | R11.1 117.36,32.53 116.71,31.88 v115.44,31.88
  Top 0.406: 1_U$16.1 106.81,35.05 106.81,35.94 arc90 102.74,40.01 B2+2.1
  Top 1.016: B2+2.1 95.25,38.1 93.6,39.75 92.58,39.75 | 92.58,39.75 83.44,39.75 81.79,38.1 B1+2.1 | S3.1 92.54,39.71 92.58,39.75
  Bottom 0.254: v115.44,31.88 115.95,32.38 115.95,33.91 115.44,34.42 114.55,34.42 113.22,33.09 1_U$16.1
V+3  (via drill 0.51)
  Top 0.254: U4.8 120.07,91.01 119,92.08 R16.1 | C4.1 R16.1 | R16.1 117.36,91.45 116.71,90.81 v115.44,90.81
  Top 0.406: 1_U$22.1 106.81,93.98 106.81,94.87 arc90 102.74,98.93 B2+3.1
  Top 1.016: B2+3.1 95.25,97.03 93.6,98.68 92.58,98.68 | 92.58,98.68 83.44,98.68 81.79,97.03 B1+3.1 | S4.1 92.54,98.64 92.58,98.68
  Bottom 0.254: v115.44,90.81 115.95,91.31 115.95,92.84 115.44,93.34 114.55,93.34 113.22,92.02 1_U$22.1

## Text on the board
Bottom: v10 | v10 | v10 | v10
Dimension: KNOCKOUT | KNOCKOUT | KNOCKOUT | KNOCKOUT
tPlace: - | - | + | + | OFF | OFF | ON | ON | + | - | + | - | + | + | 3 | 3 | + | + | + | + | 2 | 2 | - | - | 1 | 1 | 0 | + | 0 | + | - | - | - | - | - | - | + | + | - | - | - | - | + | + | OFF | OFF | ON | ON | + | - | + | - | + | + | 3 | 3 | + | + | + | + | 2 | 2 | - | - | 1 | 1 | 0 | + | 0 | + | - | - | - | - | - | - | + | + | - | -
bPlace: 3 | 3 | + | + | 2 | 2 | - | - | 1 | 1 | 0 | 0 | 3 | 3 | + | + | 2 | 2 | - | - | 1 | 1 | 0 | 0